# Altium PCB CCLights.pcbdoc
Units mm, origin at the board's own origin, x right, y up, seen from the top; angles counter-clockwise.
Board outline 18 x 60 mm, 2 copper layers (Top Layer, Bottom Layer); 23 components, 25 nets, 112 pads, 21 vias.
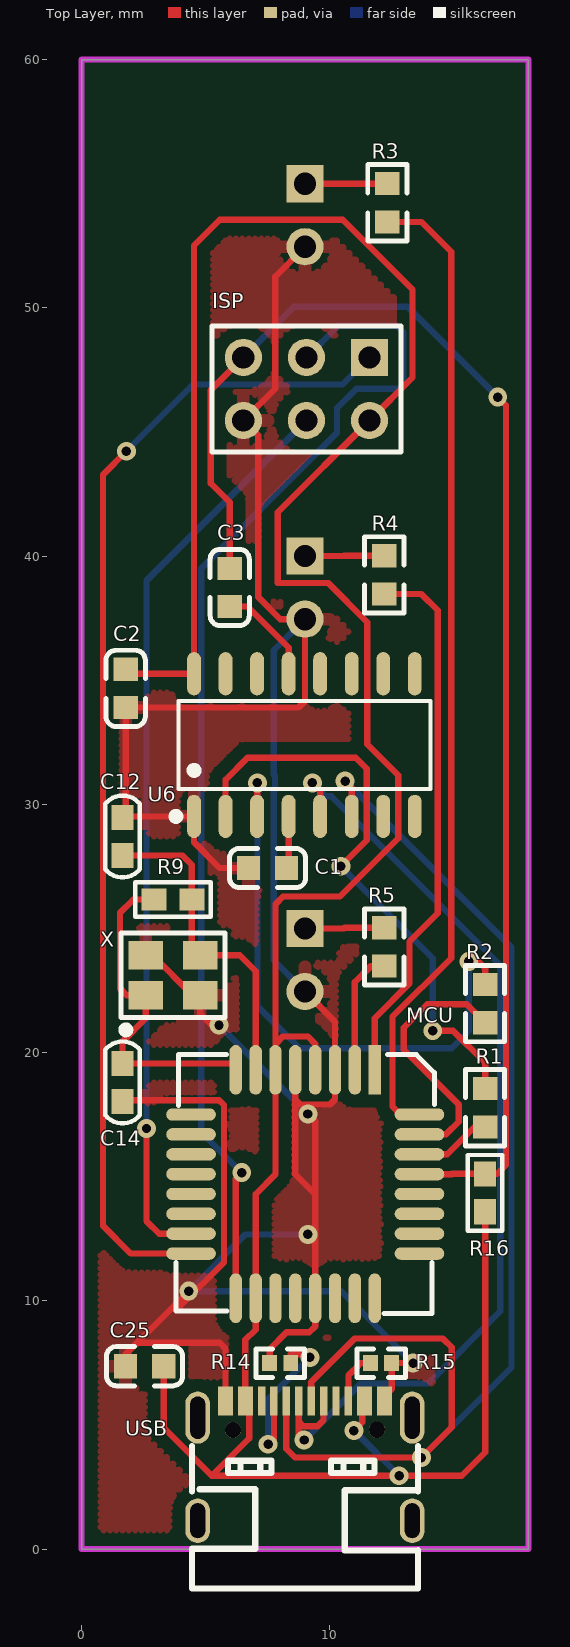
[diagram p0: Top Layer view]
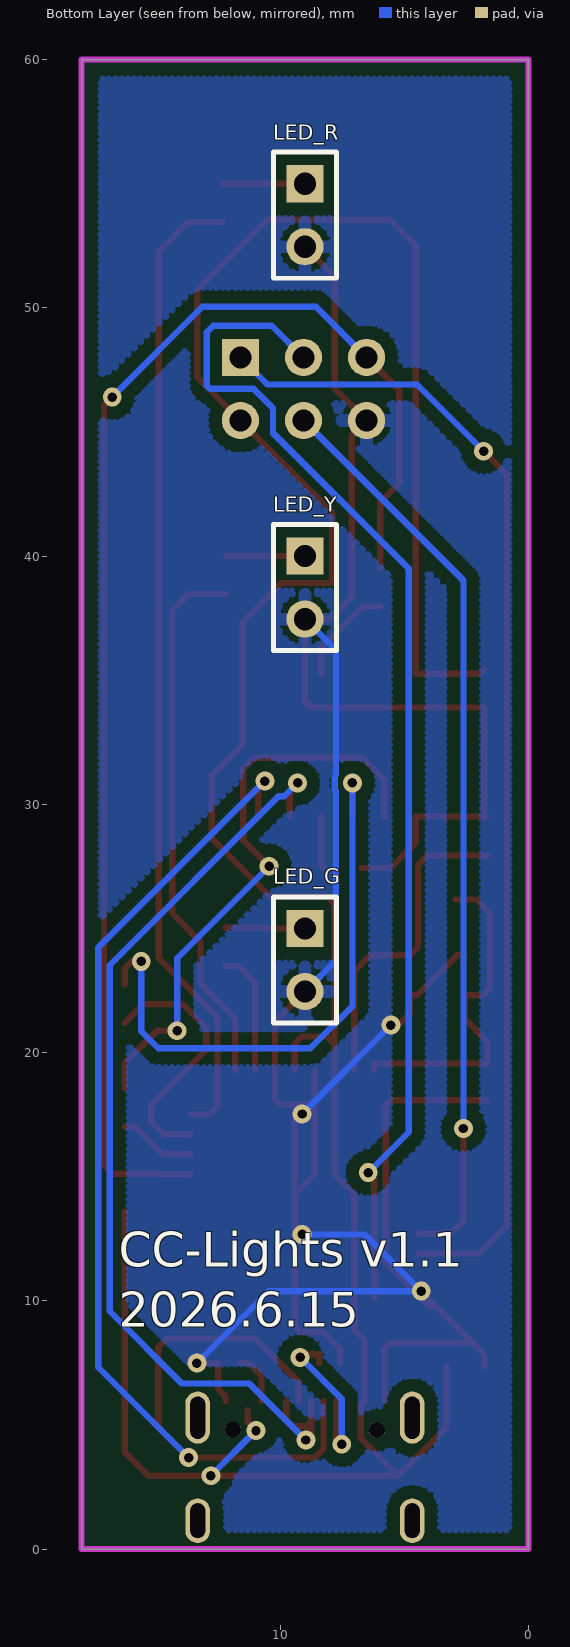
[diagram p1: Bottom Layer view, seen from below]
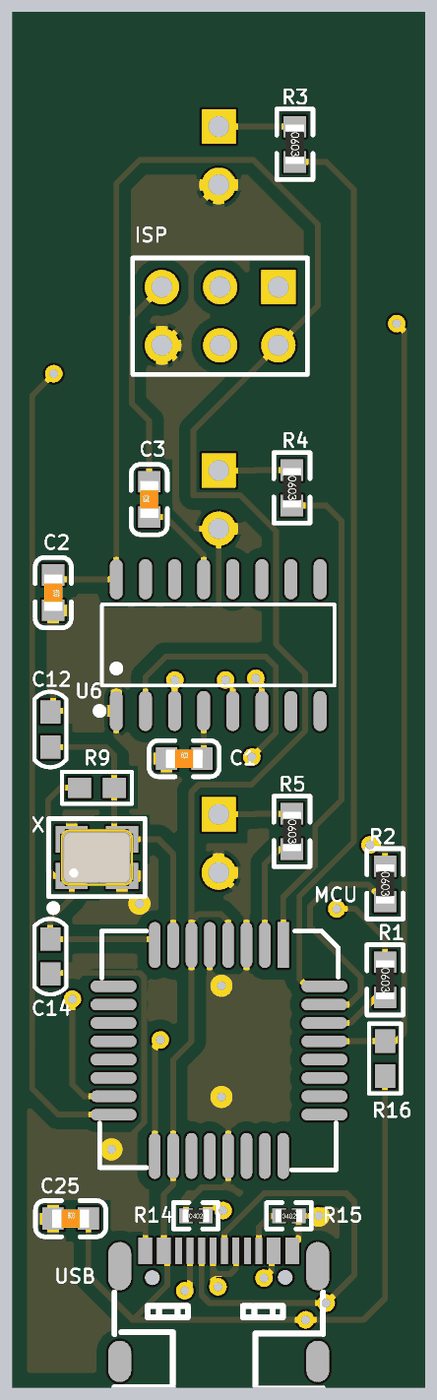
[diagram p2: 3D render of the assembled board from above, using the file's embedded part models]

## Layer stack, top to bottom
Top Solder: solder mask 0.0102, Solder Resist, Dk 3.5
Top Layer: signal copper 0.0356
Dielectric 1: dielectric 0.32, FR-4, Dk 4.8
Bottom Layer: signal copper 0.0356
Bottom Solder: solder mask 0.0102, Solder Resist, Dk 3.5

## Board outline
0,0 0,60 18,60 18,0

## Design rules (kind name [scope] priority, off if disabled: settings)
Clearance poly [inpolygon] p1: gap=0.508
Clearance [All] p2: gap=0.2
HoleSize [All] p1: absolutevalues=TRUE maxlimit=7.62 minlimit=0.025 maxpercent=80.000 minpercent=20.000
HoleToHoleClearance [All] p1: gap=0.127 allowstackedmicrovias=TRUE
MinimumSolderMaskSliver [All] p1: minsoldermaskwidth=0.127
PolygonConnect c [InNet('NetC8_1')] p1: connectstyle=Direct reliefconductorwidth=0.254 reliefentries=4 polygonreliefangle="90 Angle" airgapwidth=0.254
PolygonConnect vcc-l [InNet('NetD3_2')] p2: connectstyle=Direct reliefconductorwidth=0.254 reliefentries=4 polygonreliefangle="90 Angle" airgapwidth=0.254
PolygonConnect vcc [InNet('VCC')] p3: connectstyle=Direct reliefconductorwidth=0.254 reliefentries=4 polygonreliefangle="90 Angle" airgapwidth=0.254
PolygonConnect via [isvia] p4: connectstyle=Direct reliefconductorwidth=0.254 reliefentries=4 polygonreliefangle="90 Angle" airgapwidth=0.254
PolygonConnect [All] p5: connectstyle=Relief reliefconductorwidth=0.508 reliefentries=4 polygonreliefangle="90 Angle" airgapwidth=0.254
RoutingVias [All] p1: holewidth=0.381 width=0.762 viastyle="Through Hole" minholewidth=0.381 minwidth=0.762 maxholewidth=0.711 maxwidth=1.27
SilkToBoardRegionClearance [All] p1 off:
SilkToSilkClearance [All] p1 off: silktosilkclearance=0
SilkToSolderMaskClearance SilkscreenOverComponentPads [IsPad] p1 off: minsilkscreentomaskgap=0 clearancetoexposedcopper=TRUE
SolderMaskExpansion [All] p1: expansion=0.102
Width [All] p1: maxlimit=2.54 minlimit=0.203 preferedwidth=0.254
24 further rules are at their usual default settings.

## Components (designator, comment, footprint, x,y, rotation, side; value= is the part's Value field where it differs from the comment)
C1 "100nF" LC-0603_C 7.493,27.432 r0 top
C2 "100nF" LC-0603_C 1.778,34.671 r270 top
C3 "100nF" LC-0603_C 5.969,38.735 r90 top
C12 "18pF" 0603C 1.651,28.702 r90 top
C14 "18pF" 0603C 1.651,18.796 r90 top
C25 "100nF/50V" LC-0603_C 2.54,7.366 r0 top
ISP "Header 3X2" HDR2X3 11.6,48 r180 top
LED_G "Header 2" HDR1X2 9,25 r270 bottom
LED_R "Header 2" HDR1X2 9,55 r270 bottom
LED_Y "Header 2" HDR1X2 9,40 r270 bottom
MCU "Atmega328P-AU" LQFP32 11.811,19.304 r270 top
R1 "300R" LC-0603_R 16.256,17.78 r270 top
R2 "300R" LC-0603_R 16.256,21.971 r270 top
R3 "2K" LC-0603_R 12.319,54.229 r270 top
R4 "2K" LC-0603_R 12.192,39.243 r270 top
R5 "2K" LC-0603_R 12.192,24.257 r270 top
R9 "1M" 0603R 3.683,26.162 r0 top
R14 "5.1K" LC-0402_R 8.001,7.493 r0 top
R15 "5.1K" LC-0402_R 12.065,7.493 r0 top
R16 "10K" 0603R 16.256,14.351 r90 top
U6 "CH340C" SOP-16_L10.0-W3.9-P1.27-LS6.0-BL 8.89,32.385 r0 top
USB "TYPEC-304-ACP16" USB-C-SMD_TYPE-C-16P-1 9,2.413 r0 top
X "16M 3225" LC-SMD-3225_4P 3.683,23.114 r0 top

## Footprints (in the part's own frame and the unit in brackets; to place one, negate y for a bottom-side part, rotate by r counter-clockwise, add the part's x,y. Pads: shape width x height; smd on the part's side, far side on the other; paste and mask are expansions set on the pad)
0603C [mil]
  rect 40x35 smd: 1(30,0) 2(-30,0)
  silkscreen extent -65,-28 65,28, body extent -31,-16 31,16, height 18
0603R [mil]
  rect 40x35 smd: 1(30,0) 2(-30,0)
  silkscreen extent -60,-28 60,28, body extent -31,-16 31,16, height 18
HDR1X2 [mm] "Connector; Header; 2 Position"
  rect 1.5x1.5 hole 0.9: 1(0,0)
  round 1.5 hole 0.9: 2(2.54,0)
  silkscreen extent -1.27,-1.27 3.81,1.27
HDR2X3 [mm] "Connector; Header; 3x2 Position"
  rect 1.5x1.5 hole 0.9: 1(0,0)
  round 1.5 hole 0.9: 2(0,2.54) 3(2.54,0) 4(2.54,2.54) 5(5.08,0) 6(5.08,2.54)
  silkscreen extent -1.27,-1.27 6.35,3.81
LC-0402_R [mm]
  rect 0.6x0.65 smd mask+0.051: 1(-0.425,0) 2(0.425,0)
  silkscreen extent -0.98,-0.58 0.98,0.58, body extent -0.57,-0.27 0.58,0.28, height 0.41
LC-0603_C [mm]
  rect 0.93x0.98 smd: 1(-0.77,0) 2(0.77,0)
  silkscreen extent -1.53,-0.79 1.54,0.79, body extent -0.8,-0.4 0.8,0.4, height 0.3
LC-0603_R [mm]
  rect 0.93x0.98 smd: 1(-0.77,0) 2(0.77,0)
  silkscreen extent -1.54,-0.79 1.54,0.79, body extent -0.85,-0.4 0.85,0.4, height 0.56
LC-SMD-3225_4P [mm]
  rect 1.4x1.15 smd: 1(-1.1,-0.8) 2(1.1,-0.8) 3(1.1,0.8) 4(-1.1,0.8)
  silkscreen extent -2.1,-2.35 2.1,1.7, body extent -1.6,-1.25 1.6,1.25, height 0.61
LQFP32 [mm]
  rect 2x0.5 smd: 1(0,0)
  oval 2x0.5 smd: 2(0,-0.8) 3(0,-1.6) 4(0,-2.4) 5(0,-3.2) 6(0,-4) 7(0,-4.8) 8(0,-5.6) 17(9.2,-5.6) 18(9.2,-4.8) 19(9.2,-4) 20(9.2,-3.2) 21(9.2,-2.4) 22(9.2,-1.6) 23(9.2,-0.8) 24(9.2,0)
  oval 0.5x2 smd: 9(1.8,-7.4) 10(2.6,-7.4) 11(3.4,-7.4) 12(4.2,-7.4) 13(5,-7.4) 14(5.8,-7.4) 15(6.6,-7.4) 16(7.4,-7.4) 25(7.4,1.8) 26(6.6,1.8) 27(5.8,1.8) 28(5,1.8) 29(4.2,1.8) 30(3.4,1.8) 31(2.6,1.8) 32(1.8,1.8)
  silkscreen extent -0.61,-8.01 9.81,2.4, body extent -1.35,-8.75 10.55,3.15
SOP-16_L10.0-W3.9-P1.27-LS6.0-BL [mm]
  oval 0.56x1.745 smd: 1(-4.357,-2.872) 2(-3.087,-2.872) 3(-1.817,-2.872) 4(-0.547,-2.872) 5(0.723,-2.872) 6(1.993,-2.872) 7(3.263,-2.872) 8(4.533,-2.872) 9(4.533,2.873) 10(3.263,2.873) 11(1.993,2.873) 12(0.723,2.873) 13(-0.547,2.873) 14(-1.817,2.873) 15(-3.087,2.873) 16(-4.357,2.873)
  silkscreen extent -5.24,-3.02 5.16,1.77
USB-C-SMD_TYPE-C-16P-1 [mm]
  rect 0.6x1.15 smd: A1B12(-3.2,3.551) A4B9(-2.4,3.551) B1A12(3.2,3.551) B4A9(2.4,3.551)
  rect 0.3x1.15 smd: A5(-1.25,3.551) A6(-0.25,3.551) A7(0.25,3.551) A8(1.25,3.551) B5(1.75,3.551) B6(0.75,3.551) B7(-0.75,3.551) B8(-1.75,3.551)
  oval 1x1.8 hole 0.6 slot 1.4 at 90 deg: EP(-4.32,-1.269) EP(4.32,-1.269)
  oval 1x2.1 hole 0.6 slot 1.7 at 90 deg: EP(-4.32,2.881) EP(4.32,2.881)
  round 0.65 hole 0.65 unplated: ""(-2.9,2.381) ""(2.9,2.391)
  silkscreen extent -4.55,-4 4.55,1.73

## Part data
C1 C2 C3: library part CAP, "Capacitor"
C12 C14 C25: library part Cap, "Capacitor"
ISP: "Header, 3-Pin, Dual row"
LED_G LED_R LED_Y: "Header, 2-Pin"
R1 R2 R3 R4 R5 R14 R15: library part RES2
R9 R16: library part Res2, "Resistor"
X: library part Component_1, "16M_SMD_3225"

## Via types
v1: diameter 0.762, hole 0.381, Top Layer to Bottom Layer, 21 vias

## Nets (pads, with @x,y where several pads share a name; then routed paths per layer and width w, separated by ;. In a path a pad name is that pad's centre, name@x,y a point inside that pad or via, vN(x,y) a via of type N, cw(c..) or ccw(c..) an arc to the next point about the centre after c; other vN are vias at no path point)
5V: C2.1 C25.2 ISP.2 MCU.4 MCU.6 MCU.18 R16.2 U6.16 USB.A4B9 USB.B4A9 | length 121
  Top Layer w0.254: C2.1 1.961,35.258 U6.16 4.533,52.513 5.563,53.543 10.516,53.543 13.335,50.724 13.335,47.195 ISP.2 7.899,41.759 7.899,38.913 9.931,38.913 11.506,37.338 11.506,32.419 12.76,31.166 12.76,28.635 10.414,26.289 8.128,26.289 7.811,25.972 7.811,20.345 ; C25.2 3.31,4.894 5.249,2.955 ; MCU.4 9.411,20.345 9.106,20.65 8.116,20.65 7.811,20.345 ; v1(10.973,4.775) 11.303,5.105 USB.B4A9@11.303,5.588 ; R16.2 16.256,3.895 15.316,2.955 v1(12.793,2.955) 5.249,2.955 ; 5.249,2.955 6.752,4.458 6.752,5.812 USB.A4B9 6.6,8.428 7.011,8.839 MCU.18 7.011,14.3 7.811,15.1 MCU.6 7.811,20.345
  Bottom Layer w0.254: v1(10.973,4.775) v1(12.793,2.955)
CH340_D+: U6.5 USB.A6 USB.B6 | length 39.7
  Top Layer w0.254: USB.A6 8.75,5.141 ; v1(8.966,4.394) 8.75,4.61 8.75,5.141 ; v1(9.296,30.861) 9.613,30.545 U6.5 ; USB.B6 9.75,5.2 9.503,4.953 8.938,4.953 8.75,5.141
  Bottom Layer w0.254: v1(8.966,4.394) 11.243,6.671 13.963,6.671 16.866,9.574 16.866,23.52 10.065,30.321 9.836,30.321 v1(9.296,30.861)
CH340_D-: U6.6 USB.A7 USB.B7 | length 52.8
  Top Layer w0.254: USB.B7 8.25,4.047 8.611,3.686 v1(13.687,3.686) 14.907,4.905 14.907,8.125 14.548,8.484 11.003,8.484 9.25,6.731 USB.A7 ; v1(10.617,30.937) 10.883,30.672 U6.6
  Bottom Layer w0.254: v1(10.617,30.937) 17.323,24.232 17.323,7.322 v1(13.687,3.686)
CS: MCU.14
D2: MCU.32 R3.2 | length 39.7
  Top Layer w0.254: R3.2 13.691,53.459 14.888,52.262 14.888,23.803 12.522,21.438 12.522,17.831 12.849,17.504 MCU.32
D3: MCU.1 R4.2 | length 22
  Top Layer w0.254: MCU.1 11.811,21.387 13.208,22.784 13.208,24.47 14.351,25.613 14.351,37.813 13.691,38.473 R4.2
D4: MCU.2 R5.2 | length 5
  Top Layer w0.254: MCU.2 11.011,22.839 11.659,23.487 R5.2
GND: C1.1 C2.2 C12.1 C14.2 C25.1 ISP.6 LED_G.2 LED_R.2 LED_Y.2 MCU.3 MCU.5 MCU.21 R14.1 R15.2 U6.1 USB.A1B12 USB.B1A12 X.2 X.4 | length 130.5
  Top Layer w0.254: C14.2 1.702,18.085 5.537,18.085 5.74,17.882 5.74,11.557 3.962,9.779 3.708,9.779 ; C25.1 1.77,7.841 3.708,9.779 ; 2.235,8.306 5.563,8.306 5.8,8.068 USB.A1B12 ; X.4 2.87,23.914 4.47,22.314 X.2 4.783,21.565 5.24,21.107 v1(5.537,21.107) ; v1(4.318,10.389) 3.708,9.779 ; C1.1 5.563,27.432 4.533,28.462 U6.1 1.7,29.513 1.778,29.434 C2.2 8.738,33.901 9,34.163 LED_Y.2 8.001,37.46 7.112,38.349 7.112,44.868 ISP.6 7.798,46.738 7.798,51.258 LED_R.2 ; R14.1 7.576,8.052 8.257,8.733 9.177,8.733 9.411,8.966 MCU.21 9.411,12.382 ; MCU.5 8.611,18.11 ; LED_G.2 10.211,21.249 MCU.3 10.211,18.11 10.008,17.907 8.814,17.907 8.611,18.11 ; v1(9.119,12.675) 9.411,12.382 ; v1(9.119,17.526) 9.411,17.234 9.411,14.3 ; USB.B1A12 12.2,6.155 12.49,6.445 R15.2 v1(13.356,7.493) ; 8.611,18.11 8.611,15.1 9.411,14.3 ; 9.411,12.382 9.411,14.3
  Bottom Layer w0.254: v1(5.537,21.107) v1(9.119,17.526) ; LED_G.2 7.747,23.713 7.747,30.52 7.795,30.568 7.795,31.154 7.747,31.202 7.747,36.207 LED_Y.2 ; v1(9.119,12.675) 6.604,12.675 v1(4.318,10.389) 10.461,10.389 v1(13.356,7.493)
NetC1_2: C1.2 U6.4 | length 2.1
  Top Layer w0.254: C1.2 8.343,27.512 U6.4
NetC3_1: C3.1 U6.13 | length 4.1
  Top Layer w0.254: C3.1 6.688,37.965 8.343,36.311 U6.13
NetLED_G_1: LED_G.1 R5.1 | length 3.2
  Top Layer w0.254: LED_G.1 10.566,25 10.593,25.027 R5.1
NetLED_R_1: LED_R.1 R3.1 | length 3.3
  Top Layer w0.254: LED_R.1 10.643,55 10.644,54.999 R3.1
NetLED_Y_1: LED_Y.1 R4.1 | length 3.2
  Top Layer w0.254: LED_Y.1 10.566,40 10.579,40.013 R4.1
NetR1_1: R1.1 U6.2 | length 23.9
  Top Layer w0.254: U6.2 5.803,30.993 6.687,31.877 11.049,31.877 11.49,31.436 11.49,28.55 v1(10.443,27.504) ; v1(14.148,20.879) 14.961,20.879 16.256,19.583 R1.1
  Bottom Layer w0.254: v1(10.443,27.504) 14.148,23.8 v1(14.148,20.879)
NetR2_1: R2.1 U6.3 | length 24.1
  Top Layer w0.254: U6.3 7.073,30.847 v1(7.087,30.861) ; v1(15.596,23.673) 15.977,23.673 16.256,23.393 R2.1
  Bottom Layer w0.254: v1(7.087,30.861) 7.087,21.869 8.785,20.171 14.91,20.171 15.596,20.857 v1(15.596,23.673)
NetR14_2: R14.2 USB.A5 | length 7.2
  Top Layer w0.254: v1(7.518,4.224) 7.75,4.455 USB.A5 ; R14.2 8.426,7.849 9.068,7.849 v1(9.195,7.722)
  Bottom Layer w0.254: v1(7.518,4.224) 7.518,6.045 v1(9.195,7.722)
NetR15_1: R15.1 USB.B5 | length 2.1
  Top Layer w0.254: USB.B5 10.75,6.991 11.252,7.493 R15.1
RST: C3.2 ISP.5 MCU.29 R16.1 | length 56.7
  Top Layer w0.254: C3.2 5.969,42.164 5.207,42.926 5.207,46.687 ISP.5 ; MCU.29 14.91,15.104 14.919,15.113 R16.1 16.739,15.113 17.094,15.469 17.094,46.076 v1(16.764,46.406)
  Bottom Layer w0.254: ISP.5 8.558,50.038 13.132,50.038 v1(16.764,46.406)
RXD: MCU.30 R1.2 | length 3.1
  Top Layer w0.254: MCU.30 14.736,15.904 15.842,17.01 R1.2
SCK: ISP.3 MCU.17 | length 48.6
  Top Layer w0.254: MCU.17 6.211,14.923 v1(6.452,15.164)
  Bottom Layer w0.254: v1(6.452,15.164) 4.826,16.789 4.826,39.497 10.287,44.958 10.287,45.949 11.074,46.736 12.827,46.736 12.954,46.863 12.954,49.022 12.7,49.276 10.336,49.276 ISP.3
SI: ISP.4 MCU.15 | length 36.9
  Top Layer w0.254: v1(2.616,16.942) 2.616,13.212 3.124,12.704 MCU.15
  Bottom Layer w0.254: v1(2.616,16.942) 2.616,39.016 ISP.4
SO: ISP.1 MCU.16 | length 47
  Top Layer w0.254: v1(1.803,44.221) 0.864,43.282 0.864,13.03 1.99,11.904 MCU.16
  Bottom Layer w0.254: v1(1.803,44.221) 4.496,46.914 10.514,46.914 ISP.1
TXD: MCU.31 R2.2 | length 10.5
  Top Layer w0.254: MCU.31 14.681,16.704 15.189,17.212 15.189,17.907 12.979,20.117 12.979,20.994 13.925,21.94 15.517,21.94 R2.2
X1: C12.2 MCU.7 R9.1 X.3 | length 13.2
  Top Layer w0.254: C12.2 4.064,27.94 4.445,27.559 R9.1 4.445,24.252 X.3 6.375,23.914 7.011,23.278 MCU.7
X2: C14.1 MCU.8 R9.2 X.1 | length 13.7
  Top Layer w0.254: R9.2 2.083,26.162 1.549,25.629 1.549,22.581 1.816,22.314 X.1 2.583,21.379 1.651,20.447 C14.1 6.211,19.558 MCU.8
pads on no net: MCU.9 MCU.10 MCU.11 MCU.12 MCU.13 MCU.19 MCU.20 MCU.22 MCU.23 MCU.24 MCU.25 MCU.26 MCU.27 MCU.28 U6.7 U6.8 U6.9 U6.10 U6.11 U6.12 U6.14 U6.15 USB. USB.A8 USB.B8 USB.EP

## Polygon pours and split planes (outlines as drawn)
GND on Top Layer "GND_L01_P020" (hatched 90Degree grid 0.254 track 0.254, remove dead copper, pour order 20): -1.905,61.341 -1.905,-1.778 20.32,-1.778 20.701,-1.397 20.193,-0.889 20.193,61.976
GND on Bottom Layer "GND_L02_P022" (hatched 90Degree grid 0.254 track 0.254, remove dead copper, pour order 22): -2.159,62.357 -2.159,-1.778 -1.524,-2.413 -1.397,-2.54 19.304,-2.54 19.304,61.976 19.431,62.103

## Keep-outs
Keep-Out Layer:
  the board outline again, w0.254

## Silkscreen, mask and mechanical layers (free items; w line width, h text height)
Bottom Overlay:
  text "CC-Lights v1.1 / 2026.6.15" at 16.5,8.5 h2.4